# EAGLE board PDB Protection Prototype (EAGLE 8.3.2)
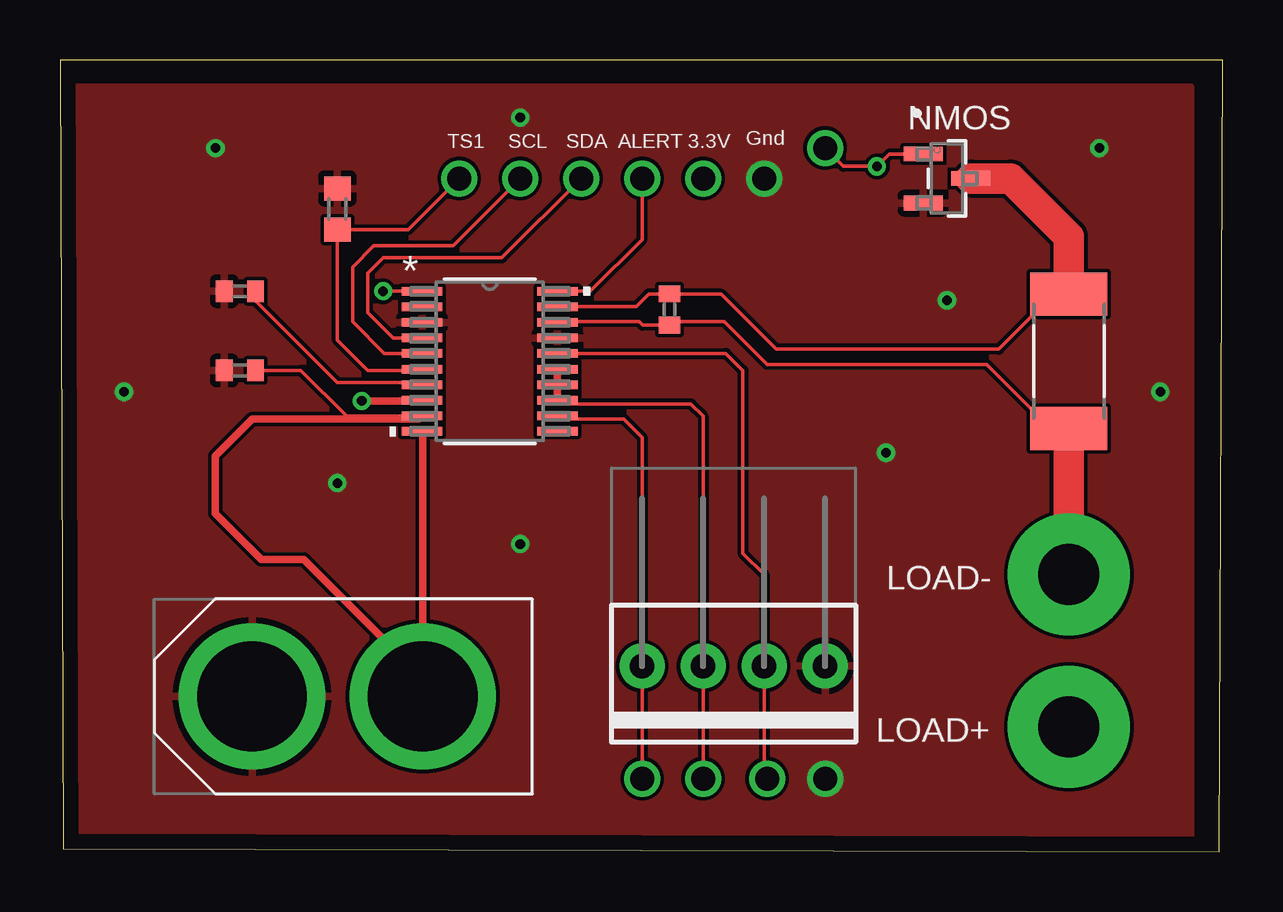
[diagram p0: board, top side]
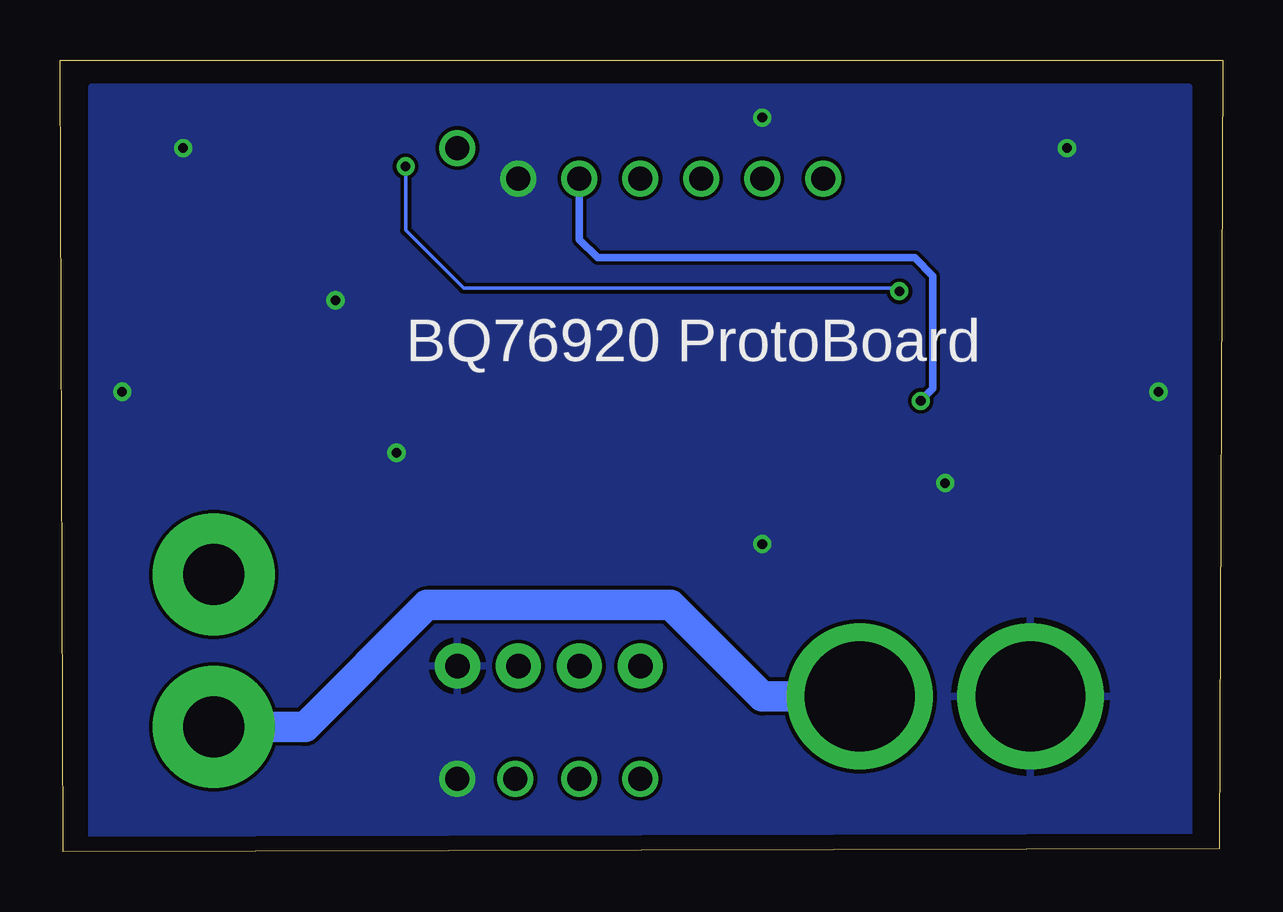
[diagram p1: board, bottom side, seen from below]

Size 48.44 x 33.01 mm. Coordinates in mm from the lower left corner, seen from the top.
Outline: 0.13,0.13 48.31,0 48.44,33.01 0,33.01 0.13,0.13
Copper layers (1*16): Top 2mil / dielectric 9mil / Bottom 2mil
Design rules "pie": minimum track width 6mil, minimum drill 15mil, track to track 6mil, track to pad 6mil, pad to pad 6mil, via to via 6mil, smd to smd 6mil, copper to edge 25mil, drill to drill 7mil, minimum pad ring 7mil, minimum via ring 7mil, stop-mask expansion 3mil, vias tented up to drill 21mil, thermal gap 10mil

## Footprints (pad centres in the part's own frame; a part is rotated, then mirrored left to right if it is on the bottom)
C0402 = smd 0.7 x 0.9: 1 -0.65,0; 2 0.65,0
1X04-MTA = drill 1.016 pad 1.88: 1 -3.81,0; 2 -1.27,0; 3 1.27,0; 4 3.81,0
R2512 = smd 1.8 x 3.2: 1 -2.8,0; 2 2.8,0
R0603 = smd 1 x 1.1: 1 -0.85,0; 2 0.85,0
PW20 = smd 1.676 x 0.356: 1 -2.819,2.925; 2 -2.819,2.275; 3 -2.819,1.625; 4 -2.819,0.975; 5 -2.819,0.325; 6 -2.819,-0.325; 7 -2.819,-0.975; 8 -2.819,-1.625; 9 -2.819,-2.275; 10 -2.819,-2.925; 11 2.819,-2.925; 12 2.819,-2.275; 13 2.819,-1.625; 14 2.819,-0.975; 15 2.819,-0.325; 16 2.819,0.325; 17 2.819,0.975; 18 2.819,1.625; 19 2.819,2.275; 20 2.819,2.925
SOT-23-M = smd 0.612 x 1.626: 1 -1.025,-0.996; 2 1.025,-0.996; 3 0,0.996
XT60CONNECTOR = drill 4.572 pad 6.096: 12V -3.556,0; GND 3.556,0

## Placement (x,y rotation side)
C1  1uF  [C0402]  7.49,23.37 180 top
C2  1uF  [C0402]  7.49,20.07 180 top
C3  .1uF  [C0402]  25.4,22.61 90 top
JP1  [1X04-MTA]  28.07,7.75 180 top
R_SHUNT  70m  [R2512]  42.04,20.45 90 top
R_TS  10k  [R0603]  11.56,26.8 270 top
U1  BQ7692000PWR  [PW20]  17.91,20.45 0 top
U2  DMN6140L-13SOT-23-M  [SOT-23-M]  36.96,28.07 270 top
U$1  XT60CONNECTOR  [XT60CONNECTOR]  11.56,6.48 180 top

## Library data of the parts
C1 C2 = adafruit; CAPACITANCE: 1uF; DIGIKEY_LINK: https://www.digikey.com/product-detail/en/tdk-corporation/CGB2A1X5R1E105K033BC/445-13185-1-ND/3954851; PART_NUMBER: CGB2A1X5R1E105K033BC; VOLTAGE: 25V
C3 = adafruit; CAPACITANCE: .1uF; DIGIKEY_LINK: https://www.digikey.com/product-detail/en/samsung-electro-mechanics/CL05A104MP5NNNC/1276-1443-1-ND/3889529; PART_NUMBER: CL05A104MP5NNNC; VOLTAGE: 10V
JP1 = pie; PIE-INT-REF-NUM: MTA
R_SHUNT = adafruit; DIGIEKY_LINK: https://www.digikey.com/product-detail/en/bourns-inc/CRA2512-FZ-R070ELF/CRA2512-FZ-R070ELFTR-ND/2563873; PART_NUMBER: CRA2512-FZ-R070ELF; POWER: 3W; RESISTANCE: 70m; TOLERANCE: 1%
R_TS = adafruit
U1 = BQ7292000PWR; MANUFACTURER_PART_NUMBER: BQ7692000PWR; VENDOR: Texas Instruments
U2 = DMN6140L; DIGIKEY_LINK: https://www.digikey.com/product-detail/en/diodes-incorporated/DMN6140L-13/DMN6140L-13DICT-ND/5218250; FET_TYPE: N-Channel; ID: 1.6A; MANUFACTURER_PART_NUMBER: DMN6140L13; VDSS: 60V; VENDOR: Diodes Inc; VGS_TH: 3V
U$1 = pie; PARTNUMBER: PRT-10474

## Nets
3.3V: U1.8
ALERT: U1.20
BCELL1: JP1.2 U1.16
BCELL2: JP1.3 U1.13 U1.14 U1.15
BCELL3: JP1.4 U1.12
DSG: U1.1 U2.1
GND: C1.2 C2.2 JP1.1 R_TS.1 U1.3 U1.17 U2.2 U$1.GND
LOAD-: C3.1 R_SHUNT.1 U1.18
N$3: C3.2 R_SHUNT.2 U1.19 U2.3
N$5: C1.1 U1.7
SCL: U1.5
SDA: U1.4
TS1: R_TS.2 U1.6
VBAT: C2.1 U1.9 U1.10 U$1.12V

## Tracks (layer width: path | path; a pad name or v marks a point on that pad's centre or on a via)
3.3V  (via drill 0.4, 1)
  Top 0.305: v12.57,18.8 15.06,18.8 U1.8
  Bottom 0.305: v12.57,18.8 12.07,19.3 12.07,24 12.83,24.77 26.04,24.77 26.8,25.53 v26.8,28.07
ALERT  (via drill 1)
  Top 0.152: U1.20 22.1,23.37 24.26,25.53 v24.26,28.07
BCELL1  (via drill 1 pad 1.3)
  Top 0.152: U1.16 27.74,20.77 28.45,20.07 28.45,12.45 29.34,11.56 JP1.2 29.34,3.18 v29.46,3.05
BCELL2  (via drill 1 pad 1.3)
  Top 0.152: U1.13 20.88,18.67 26.29,18.67 26.8,18.16 JP1.3 v26.8,3.05
  Top 0.305: U1.15 U1.14 U1.13
BCELL3  (via drill 1 pad 1.3)
  Top 0.152: U1.12 20.86,18.03 23.49,18.03 24.26,17.27 JP1.4 v24.26,3.05
DSG  (via drill 0.4, 1 pad 1.3)
  Top 0.152: U2.1 34.55,29.09 v34.04,28.57 32.64,28.57 v31.88,29.34 | v13.46,23.37 U1.1
  Bottom 0.152: v13.46,23.37 13.59,23.49 31.62,23.49 34.04,25.91 v34.04,28.57
GND  (via drill 0.4, 1, 1 pad 1.3)
  other vias: 29.34,28.07 2.67,19.18 6.48,29.34 19.18,30.61 43.31,29.34 45.85,19.18 36.96,22.99 19.18,12.83 31.88,3.05 11.56,15.37 34.42,16.64
  pour Top: 0.13,31.88 47.12,31.88 47.12,0.13 0.13,0.13
  pour Bottom: 1.4,31.88 47.12,31.88 47.12,0.13 1.4,0.13
LOAD-  (via drill 2.54 pad 5.08)
  Top 0.152: U1.18 20.75,22.1 24.13,22.1 24.27,21.96 C3.1 25.54,22.1 27.69,22.1 29.46,20.32 38.61,20.32 41.28,17.65 R_SHUNT.1
  Top 1.27: v42.04,11.56 R_SHUNT.1
N$3
  Top 0.152: U1.19 24,22.73 24.53,23.26 C3.2 25.41,23.24 27.56,23.24 29.84,20.95 39.12,20.95 41.41,23.25 R_SHUNT.2
  Top 1.27: U2.3 39.62,28.07 42.04,25.65 R_SHUNT.2
N$5
  Top 0.152: C1.1 8.14,22.97 11.56,19.56 15,19.56 U1.7
SCL  (via drill 1)
  Top 0.152: U1.5 13.52,20.77 12.19,22.1 12.19,24.38 13.08,25.27 16.38,25.27 v19.18,28.07
SDA  (via drill 1)
  Top 0.152: U1.4 13.88,21.42 12.83,22.48 12.83,24.13 13.46,24.77 18.41,24.77 v21.72,28.07
TS1  (via drill 1)
  Top 0.152: U1.6 15.03,20.07 12.83,20.07 11.56,21.34 R_TS.2 14.52,25.95 v16.64,28.07
VBAT  (via drill 2.54 pad 5.08)
  Top 0.152: C2.1 10.03,20.07 11.94,18.16 15.08,18.16 U1.9
  Top 0.305: 15.08,18.16 14.95,18.03 8,18.03 6.48,16.51 6.48,14.1 8.38,12.19 10.16,12.19 15.11,7.24 U$1.12V 15.11,17.5 U1.10
  Bottom 1.27: U$1.12V 19.18,6.48 22.99,10.29 33.15,10.29 38.23,5.21 v42.04,5.21

## Text on the board
tNames: NMOS | TS1 | SCL | SDA | ALERT | 3.3V | Gnd | LOAD- | LOAD+
bNames: BQ76920 ProtoBoard